# Altium PCB LM5117.PcbDoc
Units mil, origin at the board's own origin, x right, y up, seen from the top; angles counter-clockwise.
Board outline 3250.03 x 2185.03 mil, 4 copper layers (Top Layer, MidLayer1, MidLayer2, Bottom Layer); 24 components, 17 nets, 86 pads, 86 vias.
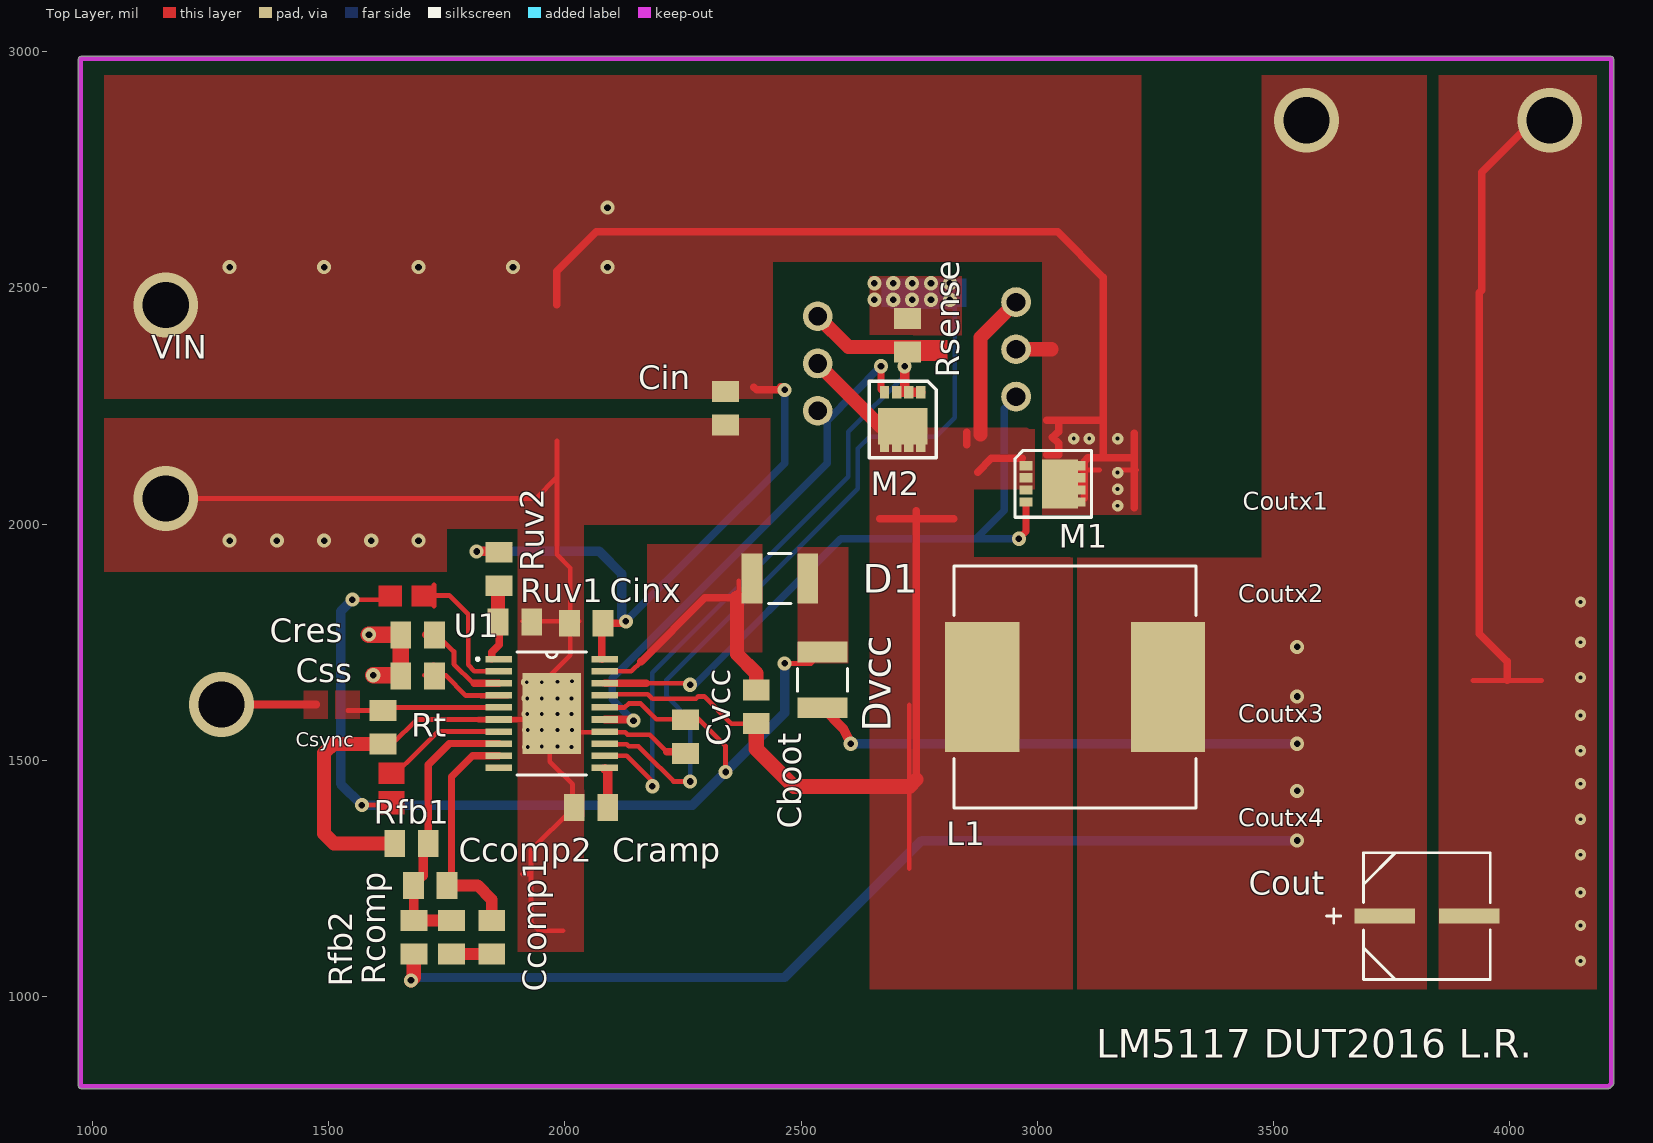
[diagram p0: Top Layer view]
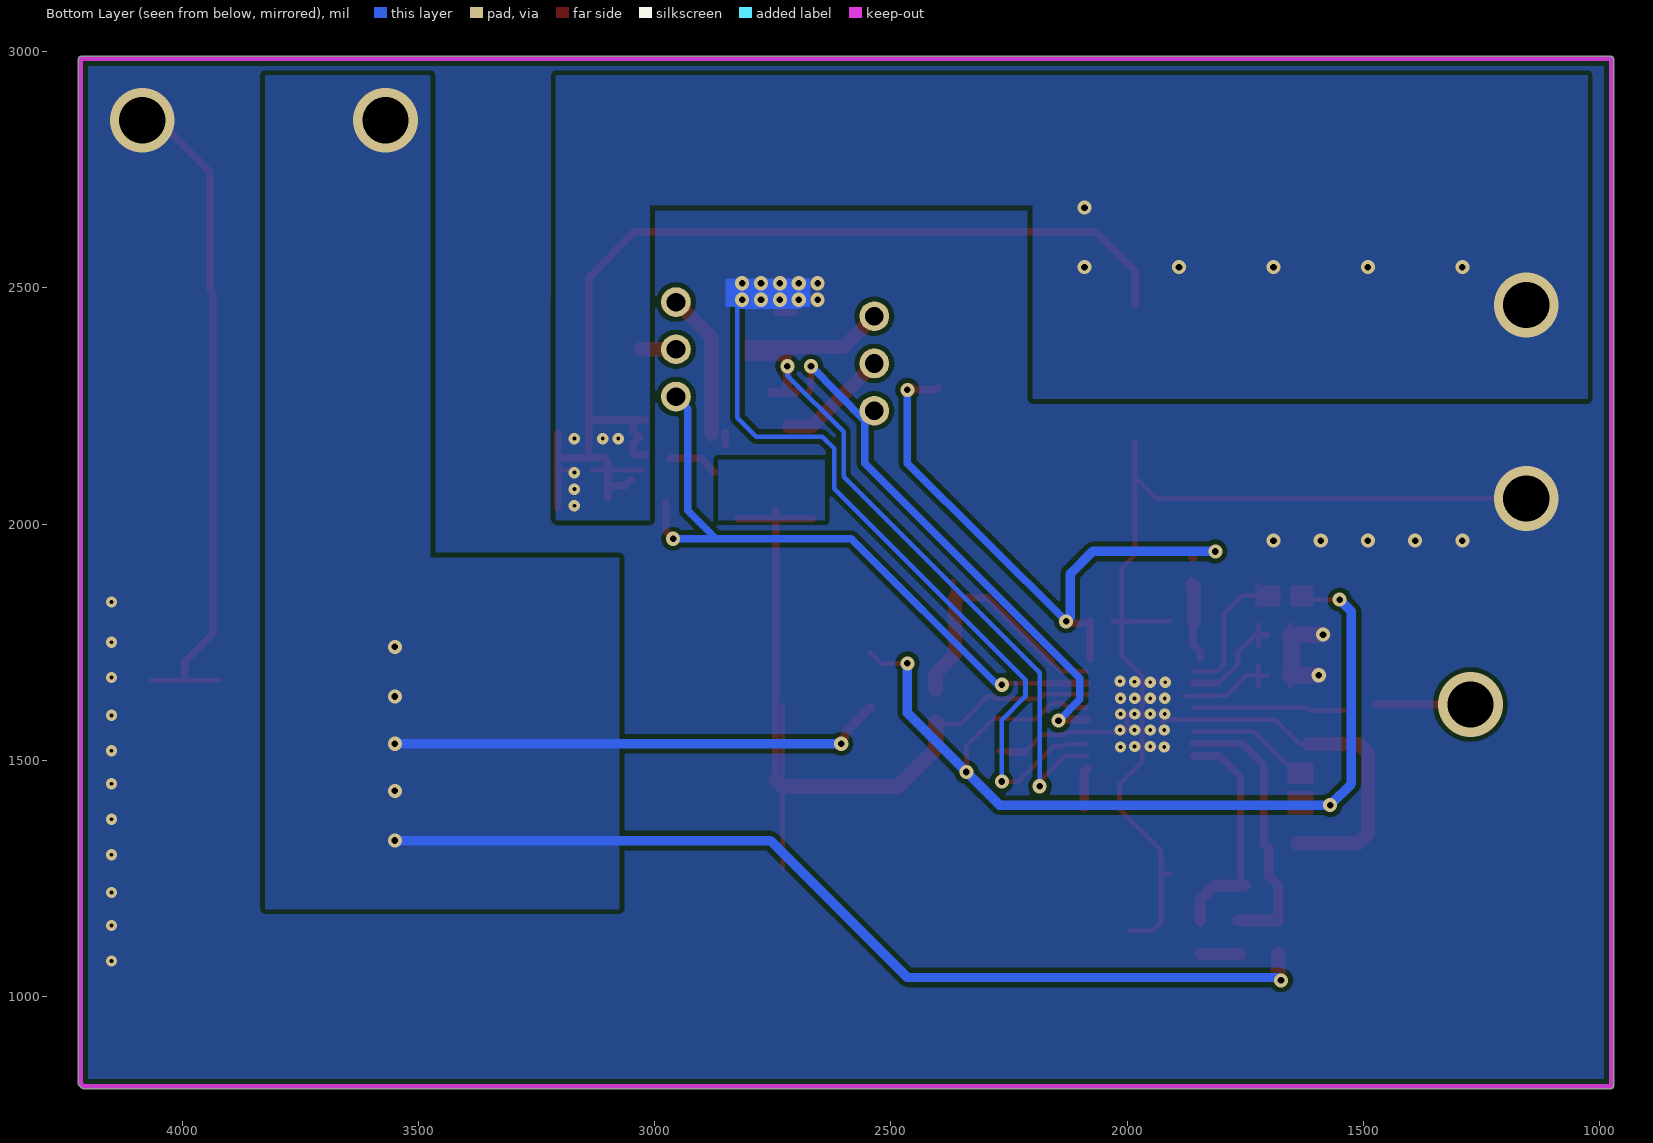
[diagram p1: Bottom Layer view, seen from below]

## Layer stack, top to bottom
Top Solder: solder mask 0.4, Solder Resist, Dk 3.5
Top Layer: signal copper 1.4
Dielectric1: core 12.6, FR-4, Dk 4.8
MidLayer1: signal copper 1.4
Dielectric2: prepreg 12.6, FR-4, Dk 4.8
MidLayer2: signal copper 1.4
Dielectric3: core 12.6, FR-4, Dk 4.8
Bottom Layer: signal copper 1.4
Bottom Solder: solder mask 0.4, Solder Resist, Dk 3.5

## Board outline
969.99,810 ccw(c975,810) 975,804.99 4210,804.99 ccw(c4210,810) 4213.56,806.47 4213.55,806.45 4218.55,811.45 4218.53,811.44 ccw(c4215,815) 4220.02,815 4220.02,2985 ccw(c4215,2985) 4215,2990.01 975,2990.01 ccw(c975,2985) 969.99,2985

## Design rules (kind name [scope] priority, off if disabled: settings)
Clearance [All] p1: gap=10
PlaneConnect [All] p1: planeconnectstyle=Direct reliefexpansion=20 reliefentries=4 reliefconductorwidth=10 reliefairgap=10
PolygonConnect [All] p1: connectstyle=Direct reliefconductorwidth=10 reliefentries=4 polygonreliefangle="90 Angle" airgapwidth=10
RoutingVias [All] p1: holewidth=28 width=50 viastyle="Through Hole" minholewidth=28 minwidth=50 maxholewidth=28 maxwidth=50
SolderMaskExpansion [All] p1: expansion=4
Width [All] p1: maxlimit=100 minlimit=10 preferedwidth=10 minimp=50.000000 maximp=50.000000 favimp=50.000000
29 further rules are at their usual default settings.

## Components (designator, comment, footprint, x,y, rotation, side; value= is the part's Value field where it differs from the comment)
Cboot "Cap" 0805 2405,1613 r270 top
Ccomp1 "Cap" 0805 1845,1125 r90 top
Ccomp2 "Cap" 0805 1715,1235 r0 top
Cin "Cap" 0805 2340,2245 r270 top
Cinx "Cap" 0805 2045,1790 r180 top
Cout "16SVPE180M" CAPSMT_62_C10 3825,1170 r0 top
Cramp "Cap" 0805 2055,1400 r180 top
Cres "Cap" 0805 1688,1765 r180 top
Css "Cap" 0805 1688,1678 r180 top
Cvcc "Cap" 0805 2255,1550 r270 top
D1 "Diode" 1210_280 2455,1885 r180 top
Dvcc "Diode" 1210_280 2545,1670 r90 top
L1 "Inductor" SRR1208 3080,1655 r0 top
M1 "CSD16411Q3" TRANS_NexFET_Q3 3040,2085 r0 top
M2 "CSD16323Q3" TRANS_NexFET_Q3 2715,2215 r270 top
Rcomp "Res" 0805 1760,1125 r90 top
Rfb1 "Res" 0805 1675,1324 r0 top
Rfb2 "Res" 0805 1680,1125 r270 top
Rsense "Res" 0805 2725,2400 r270 top
Rt "Res" 0805 1615,1570 r90 top
Ruv1 "Res" 0805 1894,1793 r0 top
Ruv2 "Res" 0805 1860,1905 r270 top
U1 "LM5117" PWP0020A 1972,1599 r0 top
VIN "WB_BATTERY" TP-1502 1155,2462 r0 top

## Footprints (in the part's own frame and the unit in brackets; to place one, negate y for a bottom-side part, rotate by r counter-clockwise, add the part's x,y. Pads: shape width x height; smd on the part's side, far side on the other; paste and mask are expansions set on the pad)
0805 [mil]
  rect 44x57 smd: 1(-35.5,0) 2(35.5,0)
1210_280 [mil]
  rect 44x106 smd: 1(-59,0) 2(59,0)
  silkscreen extent -24,-53 24,53
CAPSMT_62_C10 [mil]
  rect 128x32 smd: 1(-89.5,0) 2(89.5,0)
  silkscreen extent -212,-134 134,134
PWP0020A [mil]
  rect 56x14 smd: 1(-112,115.16) 2(-112,89.57) 3(-112,63.98) 4(-112,38.39) 5(-112,12.8) 6(-112,-12.8) 7(-112,-38.39) 8(-112,-63.98) 9(-112,-89.57) 10(-112,-115.16) 11(112,-115.16) 12(112,-89.57) 13(112,-63.98) 14(112,-38.39) 15(112,-12.8) 16(112,12.8) 17(112,38.39) 18(112,63.98) 19(112,89.57) 20(112,115.16)
  rect 124x171 smd: 21(0,0)
  silkscreen extent -160,-130 74,130
SRR1208 [mil]
  rect 157x276 smd: 1(-196.5,0) 2(196.5,0)
  silkscreen extent -256,-256 256,256
TP-1502 [mil]
  round 65 / inner round 0 / far side round 65 hole 32: 1(0,0)
TRANS_NexFET_Q3 [mm] "TO, Thru-Hole, Vertical, Heatsink Mounted; 3 In-Line Leads; Pitch 2.54 mm"
  rect 0.68x0.5 smd: 1(-1.625,0.975) 2(-1.625,0.325) 3(-1.625,-0.325) 4(-1.625,-0.975)
  rect 0.41x0.5 smd: 5(1.385,-0.975) 6(1.385,-0.325) 7(1.385,0.325) 8(1.385,0.975)
  rect 1.96x2.65 smd: 9(0.205,0)
  silkscreen extent -2.21,-1.8 1.9,1.8

## Part data
Cboot Ccomp1 Ccomp2 Cin Cinx Cramp Cres Css Cvcc: "Capacitor"
D1 Dvcc: library part "Diode BAT17", "Silicon RF Schottky Diode for Mixer Applications in the VHF/UHF Range"
M2: "CSD19537Q3"
Rcomp Rfb1 Rfb2 Rsense Rt Ruv1 Ruv2: library part Res2, "Resistor"

## Free pads (board coordinates)
  round 62.99 hole 39.37: 2(2535,2240) 2(2535,2340) 2(2535,2440) 2(2955,2270) 2(2955,2370) 2(2955,2470)

## Via types
v1: diameter 30/30/30/30 (per signal layer), hole 14, Top Layer to Bottom Layer, 44 vias
v2: diameter 24/24/24/24 (per signal layer), hole 8, Top Layer to Bottom Layer, 37 vias
v3: diameter 137/137/137/137 (per signal layer), hole 98, Top Layer to Bottom Layer, 5 vias

## Nets (pads, with @x,y where several pads share a name; then routed paths per layer and width w, separated by ;. In a path a pad name is that pad's centre, name@x,y a point inside that pad or via, vN(x,y) a via of type N, cw(c..) or ccw(c..) an arc to the next point about the centre after c; other vN are vias at no path point)
0: Cin.2 Cinx.2 Cout.2 Cramp.2 Cres.2 Css.2 Cvcc.2 Rfb1.1 Rsense.1 Rt.1 Ruv1.2 U1.6 U1.14 U1.21 | length 5430.2
  Top Layer w10: v3(1155,2054) 1938,2054 1983,2099 ; Rt.1 1634.5,1534.5 1686.2,1586.2 U1.6 1918.8,1586.2 U1.21@1925,1580 ; Css.2@1654.5,1657 1654.5,1680 Css.2@1654.5,1702 ; Cres.2@1654.5,1743 1654.5,1766 Cres.2@1654.5,1788 ; 1910,1259 1928,1259 ; Ruv1.2@1910,1794 Cinx.2@2011,1794 ; U1.21@1915,1598 U1.21@2020,1598 ; 1927.5,1236 1927.5,1281 ; 1983,2176 1983,2099 ; Cinx.2@1992,1793.5 Cinx.2@2029,1793.5 ; 1996,1139 1946,1139 1928,1157 1928,1259 ; U1.21@2000,1598 2000,1565 2006,1559 U1.14@2084,1559 ; Cinx.2@2030,1794 Cinx.2@2011,1794 ; Cramp.2@2035,1409 Cramp.2@2016,1409 ; U1.14 U1.14@2084,1559 ; U1.14@2085,1559 U1.14@2084,1559 ; 2215.5,1517.5 2179,1554 2132.57,1554 2127.57,1559 U1.14@2084,1559 ; Cvcc.2@2227,1519.5 Cvcc.2@2272,1519.5 ; 3922,1669 4068,1669 ; 1928,1259 1928,1309 2016,1397 Cramp.2@2016,1409 ; 1983,2099 1983,1936 2011,1907 Cinx.2@2011,1794 ; Cinx.2@2011,1794 2011,1722 1968,1679 1968,1497 2016,1449 Cramp.2@2016,1409
  Top Layer w16: 2215.5,1517.5 Cvcc.2@2250,1517.5 ; Rsense.1@2705,2449 Rsense.1@2741,2449 ; 3995,1669 3995,1709 3936,1768 3936,2490 3941,2495 3941,2745 4051,2855 v3(4085,2855)
  Top Layer w30: Rt.1 1509.5,1534.5 1490,1515 1490,1345 1511,1324 Rfb1.1
  Top Layer w35: v1(1585,1766) 1654.5,1766 Cres.2@1655,1766 ; v1(1594,1680) Css.2@1652.5,1680 ; Css.2 Css.2@1652.5,1680 ; Cres.2@1652.5,1764 Css.2@1652.5,1680 ; Css.2@1655,1680 1654.5,1680 Css.2@1652.5,1680
  Bottom Layer w10: 2692.02,2460 2825,2460
  other v1: 1290,1965 1390,1965 1490,1965 1590,1965 1690,1965 2655,2475 2695,2475 2735,2475 2775,2475 2815,2475 2655,2510 2695,2510 2735,2510 2775,2510 2815,2510
  other v2: 4150,1075 4150,1150 4150,1220 4150,1300 4150,1375 4150,1450 4150,1520 1921,1528 2014,1528 1951,1529 1984,1529 1921,1564 1951,1564 1984,1564 2015,1564 4150,1595 1920,1598 1951,1598 1984,1598 2014,1598 1920,1631 1951,1631 1984,1631 2014,1631 1919,1665 1951,1665 1984,1666 2015,1667 4150,1675 4150,1750 4150,1835
NetCboot_1: Cboot.1 D1.2 U1.19 | length 620.9
  Top Layer w10: U1.19 2140.57,1688.57 2161,1709 ; 2368,1816 2368,1880
  Top Layer w16: 2161,1709 2296,1844 2364,1844
  Top Layer w30: 2364,1844 2364,1725 2405,1684 Cboot.1
NetCboot_2: Cboot.2 L1.1 M1.1 M1.2 M1.3 M2.5 M2.6 M2.7 M2.8 M2.9 pad.2@2535,2340 pad.2@2955,2470 U1.17 | length 2539.2
  Top Layer w10: U1.17 2084,1640 2175,1640 2185,1630 2277.43,1630 2282.43,1635 2295,1635 2352.5,1577.5 Cboot.2 ; 2729,1271 2729,1617
  Top Layer w16: 2666,2011 2744,2011 ; 2744,1459 2744,2011 ; 2744,2028 2744,2011 ; 2823,2011 2744,2011 ; 2851,2168 2851,2194 ; 2874,2110 2903,2139 2968,2139
  Top Layer w30: pad.2@2535,2340 2668.07,2206.93 M2.9 ; 2729,1444 2744,1459 ; 2880,2190 2880,2395 pad.2@2955,2470
  Top Layer w32: Cboot.2@2405,1581 Cboot.2 2405,1524 2485,1444 2729,1444
NetCcomp1_1: Ccomp1.1 Rcomp.1 | length 85
  Top Layer w25: Rcomp.1 Ccomp1.1
NetCcomp1_2: Ccomp1.2 Ccomp2.2 U1.9 | length 503.8
  Top Layer w15: Ccomp2.2 1760,1244.5 1760,1465 1804.43,1509.43 U1.9
  Top Layer w25: Ccomp2.2 1815,1235 1845,1205 Ccomp1.2
NetCcomp2_1: Ccomp2.1 Rcomp.2 Rfb1.2 Rfb2.1 U1.8 | length 596.2
  Top Layer w15: Rfb1.2 1710.5,1490.5 1755.02,1535.02 U1.8
  Top Layer w20: Rfb2.1 1679.5,1161 Ccomp2.1 1700,1255.5 1700,1313.5 Rfb1.2
  Top Layer w25: Rfb2.1 1764.5,1160.5 Rcomp.2@1765,1160
NetCin_1: Cin.1 Cinx.1 M1.5 M1.6 M1.7 M1.8 M1.9 pad.2@2955,2370 Ruv2.1 U1.20 VIN.1 | length 3864.8
  Top Layer w10: M1.9@3027,2114.5 3132,2114.5 ; v2@3165,2114.5 3210,2114.5
  Top Layer w16: 1983,2464 1983,2535 2066,2619 3043,2619 3140,2522 3140,2224 ; U1.20@2078,1714.16 Cinx.1@2078,1794 ; Cinx.1 2125,1790 v1(2129,1794) ; 2400,2290 2406,2284 v1(2465,2284) v1@2457,2291 ; 3020,2147 3045,2147 3045,2171 3032,2184 3045,2196 3045,2220 ; 3020,2220 3045,2220 ; M1.9@3051,2094 3063,2081 M1.6@3099,2081 ; M1.5@3099,2055 M1.6@3099,2081 ; 3140,2140 3140,2224 ; 3205,2035 3205,2140 ; 3205,2192 3205,2140 ; 3045,2220 3136,2220 3140,2224 ; M1.6@3099,2081 3099,2132 3107,2140 3205,2140
  Top Layer w20: v1(1813,1942) Ruv2.1@1860,1942 ; Ruv2.1@1861,1930 Ruv2.1@1861,1941
  Top Layer w30: pad.2@2955,2370 3030,2370
  Bottom Layer w16: v1(2129,1794) 2465,2129 v1(2465,2284)
  Bottom Layer w20: v1(1813,1942) 2073,1942 2120,1895 2120,1803 v1(2129,1794)
  other v1: 1290,2544 1490,2544 1690,2544 1890,2544 2090,2544 2090,2670
  other v2: 3170,2039 3170,2074 3170,2109 3077,2181 3110,2181 3170,2181
  other v3: 1155,2464
NetCout_1: Cout.1 Dvcc.1 L1.2 Rfb2.2 | length 3099.7
  Top Layer w20: Dvcc.1 2590,1566 v1(2605,1535)
  Top Layer w30: v1(1674,1034) 1680,1040 Rfb2.2
  Bottom Layer w20: v1(1674,1034) 1680,1040 2465,1040 2755,1330 v1(3550,1330) ; v1(2605,1535) v1(3550,1535)
  other v1: 3550,1435 3550,1635 3550,1740
  other v3: 3570,2855
NetCramp_1: Cramp.1 U1.11 | length 85.1
  Top Layer w20: U1.11@2084,1482.43 2090.5,1475.93 Cramp.1
NetCres_1: Cres.1 U1.3 | length 257.2
  Top Layer w10: Cres.1@1721.5,1743 1721.5,1766 Cres.1@1721.5,1788 ; Cres.1 1730,1765 1765,1730 1765,1703.72 1805.74,1662.98 1807.02,1662.98 ; U1.3@1851,1662 U1.3@1852,1662
  Top Layer w15: 1807.02,1662.98 U1.3
  Top Layer w16: Cres.1@1705,1766 1721.5,1766 Cres.1@1722,1766
NetCss_1: Css.1 U1.4 | length 270.1
  Top Layer w10: Css.1@1702,1680 1722,1680 1748,1680 1790,1637 U1.4@1852,1637 ; Css.1@1721.5,1657 Css.1@1721.5,1702 ; 1822,1635.5 U1.4@1879,1635.5
NetCvcc_1: Cvcc.1 D1.1 Dvcc.2 U1.16 | length 2114.1
  Top Layer w10: v1(1550,1840) 1615,1840 1620,1845 ; v1(1570,1405) 1635,1405 ; U1.16 2126.8,1611.8 2135,1620 2160,1620 2193,1587 Cvcc.1@2240,1587 ; Cvcc.1@2250,1588.5 2281.5,1588.5 2340,1530 v1(2340,1475) ; v1(2465,1705) 2521,1705 Dvcc.2
  Bottom Layer w20: v1(1550,1840) 1525,1815 1525,1450 v1(1570,1405) 2270,1405 v1(2340,1475) 2465,1600 v1(2465,1705)
NetM1_4: M1.4 pad.2@2955,2270 U1.18 | length 1426.3
  Top Layer w10: 2172.98,1662.98 2262.02,1662.98 v1(2265,1660)
  Top Layer w15: U1.18 2172.98,1662.98 ; v1(2961,1969) 2976.02,1984.02 M1.4
  Bottom Layer w15: v1(2265,1660) 2275,1660 2584,1969 2870,1969 ; pad.2@2955,2270 2930,2245 2930,2029 2870,1969 ; v1(2961,1969) 2870,1969
NetM2_1: M2.1 M2.2 M2.3 pad.2@2535,2440 Rsense.2 U1.12 | length 1577.6
  Top Layer w10: U1.12 2130.57,1509.43 v1@2190,1450
  Top Layer w20: M2.3 M2.2 ; v1(2719,2334) 2719,2287.77 M2.2 ; M2.1 M2.2
  Top Layer w30: pad.2@2535,2440 2600,2375 Rsense.2@2735,2375
  Bottom Layer w10: v1(2185,1445) 2185,1685 2600,2100 2600,2195 2719,2314 v1(2719,2334)
NetM2_4: M2.4 pad.2@2535,2240 U1.15 | length 1122.7
  Top Layer w15: v1(2669,2334) 2669,2284.68 M2.4@2674.7,2278.98
  Top Layer w16: U1.15 v1@2143,1586.2 ; v1@2143,1585 v1(2145,1584)
  Bottom Layer w16: v1(2145,1584) 2100,1629 2100,1674 2555,2129 2555,2219 v1(2669,2334)
NetRt_2: Rt.2 U1.5 | length 322.8
  Top Layer w10: 1540,1605 1540.5,1605.5 Rt.2 1621.3,1611.8 U1.5
NetRuv1_1: Ruv1.1 Ruv2.2 U1.1 | length 180.9
  Top Layer w10: Ruv2.2@1861.5,1856 Ruv2.2@1861.5,1871.5
  Top Layer w16: U1.1@1845,1715 1845,1729 1861,1745 Ruv1.1@1861,1794
  Top Layer w30: Ruv1.1 1858.5,1868.5 Ruv2.2@1861.5,1871.5
pads on no net: U1.2 U1.7 U1.10 U1.13
copper on no net: | length 2531.5
  Top Layer w10: 1630,1490 1660,1490 1665,1495 1730.61,1560.61 1860,1560.61 ; 1705,1849 1723,1849 1755,1849 1795,1809 1795,1702 1808.43,1688.57 1860,1688.57 ; 1722.5,1826 1722.5,1871 ; 2084,1535.02 2084,1534 2130.43,1534 2135,1529.43 2155.57,1529.43 2170,1515 2230,1455 v1(2265,1455)
  Top Layer w16: v3(1273,1618) 1472,1618 1473,1618
  Bottom Layer w10: v1(2265,1455) 2265,1585 2215,1635 2215,1670 2320,1775 2620,2075 2620,2160 2645,2185 2655,2185 2785,2185 2825,2225 2825,2495 2692.02,2495

## Polygon pours and split planes (outlines as drawn)
no net on Top Paste "Top Layer-No Net" (solid, remove dead copper): 2669.92,2183.7 2710.08,2183.7 2710.08,2240.79 2669.92,2240.79
no net on Top Paste "Top Layer-No Net" (solid, remove dead copper): 2719.92,2183.7 2760.08,2183.7 2760.08,2240.79 2719.92,2240.79
no net on Top Paste "Top Layer-No Net" (solid, remove dead copper): 2746.69,2174.65 2746.69,2156.93 2760.08,2156.93 2760.08,2174.65
no net on Top Paste "Top Layer-No Net" (solid, remove dead copper): 2721.1,2174.65 2721.1,2156.93 2734.49,2156.93 2734.49,2174.65
no net on Top Paste "Top Layer-No Net" (solid, remove dead copper): 2695.51,2174.65 2695.51,2156.93 2708.9,2156.93 2708.9,2174.65
no net on Top Paste "Top Layer-No Net" (solid, remove dead copper): 2669.92,2174.65 2669.92,2156.93 2683.31,2156.93 2683.31,2174.65
no net on Top Paste "Top Layer-No Net" (solid, remove dead copper): 2669.92,2287.83 2669.92,2270.12 2683.31,2270.12 2683.31,2287.83
no net on Top Paste "Top Layer-No Net" (solid, remove dead copper): 2695.51,2287.44 2695.51,2269.72 2708.9,2269.72 2708.9,2287.44
no net on Top Paste "Top Layer-No Net" (solid, remove dead copper): 2721.1,2287.83 2721.1,2270.12 2734.49,2270.12 2734.49,2287.83
no net on Top Paste "Top Layer-No Net" (solid, remove dead copper): 2746.69,2287.83 2746.69,2270.12 2760.08,2270.12 2760.08,2287.83
no net on Top Paste "Top Layer-No Net" (solid, remove dead copper): 3071.3,2039.92 3071.3,2080.08 3014.21,2080.08 3014.21,2039.92
no net on Top Paste "Top Layer-No Net" (solid, remove dead copper): 3071.3,2089.92 3071.3,2130.08 3014.21,2130.08 3014.21,2089.92
no net on Top Paste "Top Layer-No Net" (solid, remove dead copper): 3080.35,2116.69 3098.07,2116.69 3098.07,2130.08 3080.35,2130.08
no net on Top Paste "Top Layer-No Net" (solid, remove dead copper): 3080.35,2091.1 3098.07,2091.1 3098.07,2104.49 3080.35,2104.49
no net on Top Paste "Top Layer-No Net" (solid, remove dead copper): 3080.35,2065.51 3098.07,2065.51 3098.07,2078.9 3080.35,2078.9
no net on Top Paste "Top Layer-No Net" (solid, remove dead copper): 3080.35,2039.92 3098.07,2039.92 3098.07,2053.31 3080.35,2053.31
no net on Top Paste "Top Layer-No Net" (solid, remove dead copper): 2967.17,2039.92 2984.88,2039.92 2984.88,2053.31 2967.17,2053.31
no net on Top Paste "Top Layer-No Net" (solid, remove dead copper): 2967.56,2065.51 2985.28,2065.51 2985.28,2078.9 2967.56,2078.9
no net on Top Paste "Top Layer-No Net" (solid, remove dead copper): 2967.17,2091.1 2984.88,2091.1 2984.88,2104.49 2967.17,2104.49
no net on Top Paste "Top Layer-No Net" (solid, remove dead copper): 2967.17,2116.69 2984.88,2116.69 2984.88,2130.08 2967.17,2130.08
no net on Top Layer "Top Layer-No Net" (solid, pour order 0): 1447,1588 1447,1647 1498,1647 1498,1588
NetRt_2 on Top Layer "Top Layer-No Net" (solid, pour order 1): 1514,1588 1514,1647 1565,1647 1565,1588
NetCboot_1 on Top Layer "Top Layer-No Net" (solid, pour order 15): 2174,1729 2174,1957 2418,1957 2418,1729
NetCvcc_1 on Top Layer "Top Layer-No Net" (solid, pour order 16): 2600,1705 2493,1705 2493,1951 2600,1951
NetCin_1 on Top Layer "Top Layer-No Net" (solid, pour order 24): 1025,2950 3220,2950 3220,2020 3010,2020 3010,2555 2440,2555 2440,2265 1025,2265
0 on Top Layer "Top Layer-No Net" (solid, pour order 25): 1990,1379 1990,1438 2041,1438 2041,1379
0 on Top Layer "Top Layer-No Net" (solid, pour order 29): 3850,2950 4185,2950 4185,1015 3850,1015
0 on Top Layer "Top Layer-No Net" (solid, pour order 30): 2645,2525 2840,2525 2840,2400 2645,2400
0 on Top Layer "Top Layer-No Net" (solid, pour order 31): 2040,1094 1900,1094 1900,1579 1815,1579 1815,1592 1900,1592 1900,1990 1750,1990 1750,1899 1025,1899 1025,2224 2435,2224 2435,1999 2040,1999
NetCout_1 on Top Layer "Top Layer-No Net" (solid, pour order 22): 3085,1015 3825,1015 3825,2950 3475,2950 3475,1930 3085,1929
NetCboot_2 on Top Layer "Top Layer-No Net" (solid, pour order 23): 2995,2204 2995,2074 2865,2074 2865,1930 3075,1930 3075,1015 2645,1015 2645,2114 2645,2169 2645,2204
0 on Bottom Layer "MidLayer1-No Net" (solid, pour order 45): 4210,810 985,810 985,2965 975,2975 985,2985 4215,2985
NetCout_1 on Bottom Layer "Top Layer-No Net" (solid, pour order 18): 3075,1185 3825,1185 3825,2950 3475,2950 3475,1930 3075,1929
NetCin_1 on Bottom Layer "Top Layer-No Net" (solid, pour order 19): 1025,2950 3209,2950 3210,2008 3010,2008 3010,2675 2200,2675 2200,2265 1025,2265
NetCboot_2 on Bottom Layer "Top Layer-No Net" (solid, pour order 20): 2640,2136 2640,2008 2865,2008 2865,2136

## Keep-outs
Keep-Out Layer:
  lines w10: 975,810 4210,810 4215,815 4215,2985 975,2985 975,810

## Other copper
Top Layer:
  rectangle net NetM2_1: 2710,2345 2810,2390
  rectangle: 1675,1826 1722.5,1870
  rectangle net NetCvcc_1: 1605,1825 1655,1870
  rectangle: 1605,1450 1660,1495
  rectangle net NetCvcc_1: 1605,1385 1660,1435
Bottom Layer:
  rectangle net 0: 2670,2460 2850,2520

## Silkscreen, mask and mechanical layers (free items; w line width, h text height)
Top Overlay:
  text "Coutx1" at 3435,2030 h37
  text "Coutx2" at 3425,1835 h37
  text "Coutx3" at 3425,1580 h37
  text "Csync" at 1430,1529 h30
  text "Coutx4" at 3425,1360 h37
  text "LM5117 DUT2016 L.R." at 3125,870 h60
Top Solder:
  rectangle: 2295,1775 2420,1945
  rectangle: 2490,1735 2600,1940
  rectangle: 2695,2350 2810,2390
  rectangle: 2695,2400 2795,2460
  rectangle: 2785,1450 3030,1855
  rectangle: 3130,1455 3405,1860
  rectangle: 3665,1025 3825,2240
  rectangle: 3855,1025 3995,2235
  rectangle: 1350,2125 2375,2230
  rectangle: 1350,2265 2375,2385
  rectangle: 1675,1830 1720,1865
  rectangle: 1620,1830 1655,1865
  rectangle: 1605,1390 1660,1435
  rectangle: 1605,1450 1660,1495